# Altium PCB TPS54331 MOUDLE.PcbDoc
Units mm, origin at the board's own origin, x right, y up, seen from the top; angles counter-clockwise.
Board outline 33.75 x 33.7 mm, 2 copper layers (Top Layer, Bottom Layer); 27 components, 12 nets, 89 pads, 43 vias.
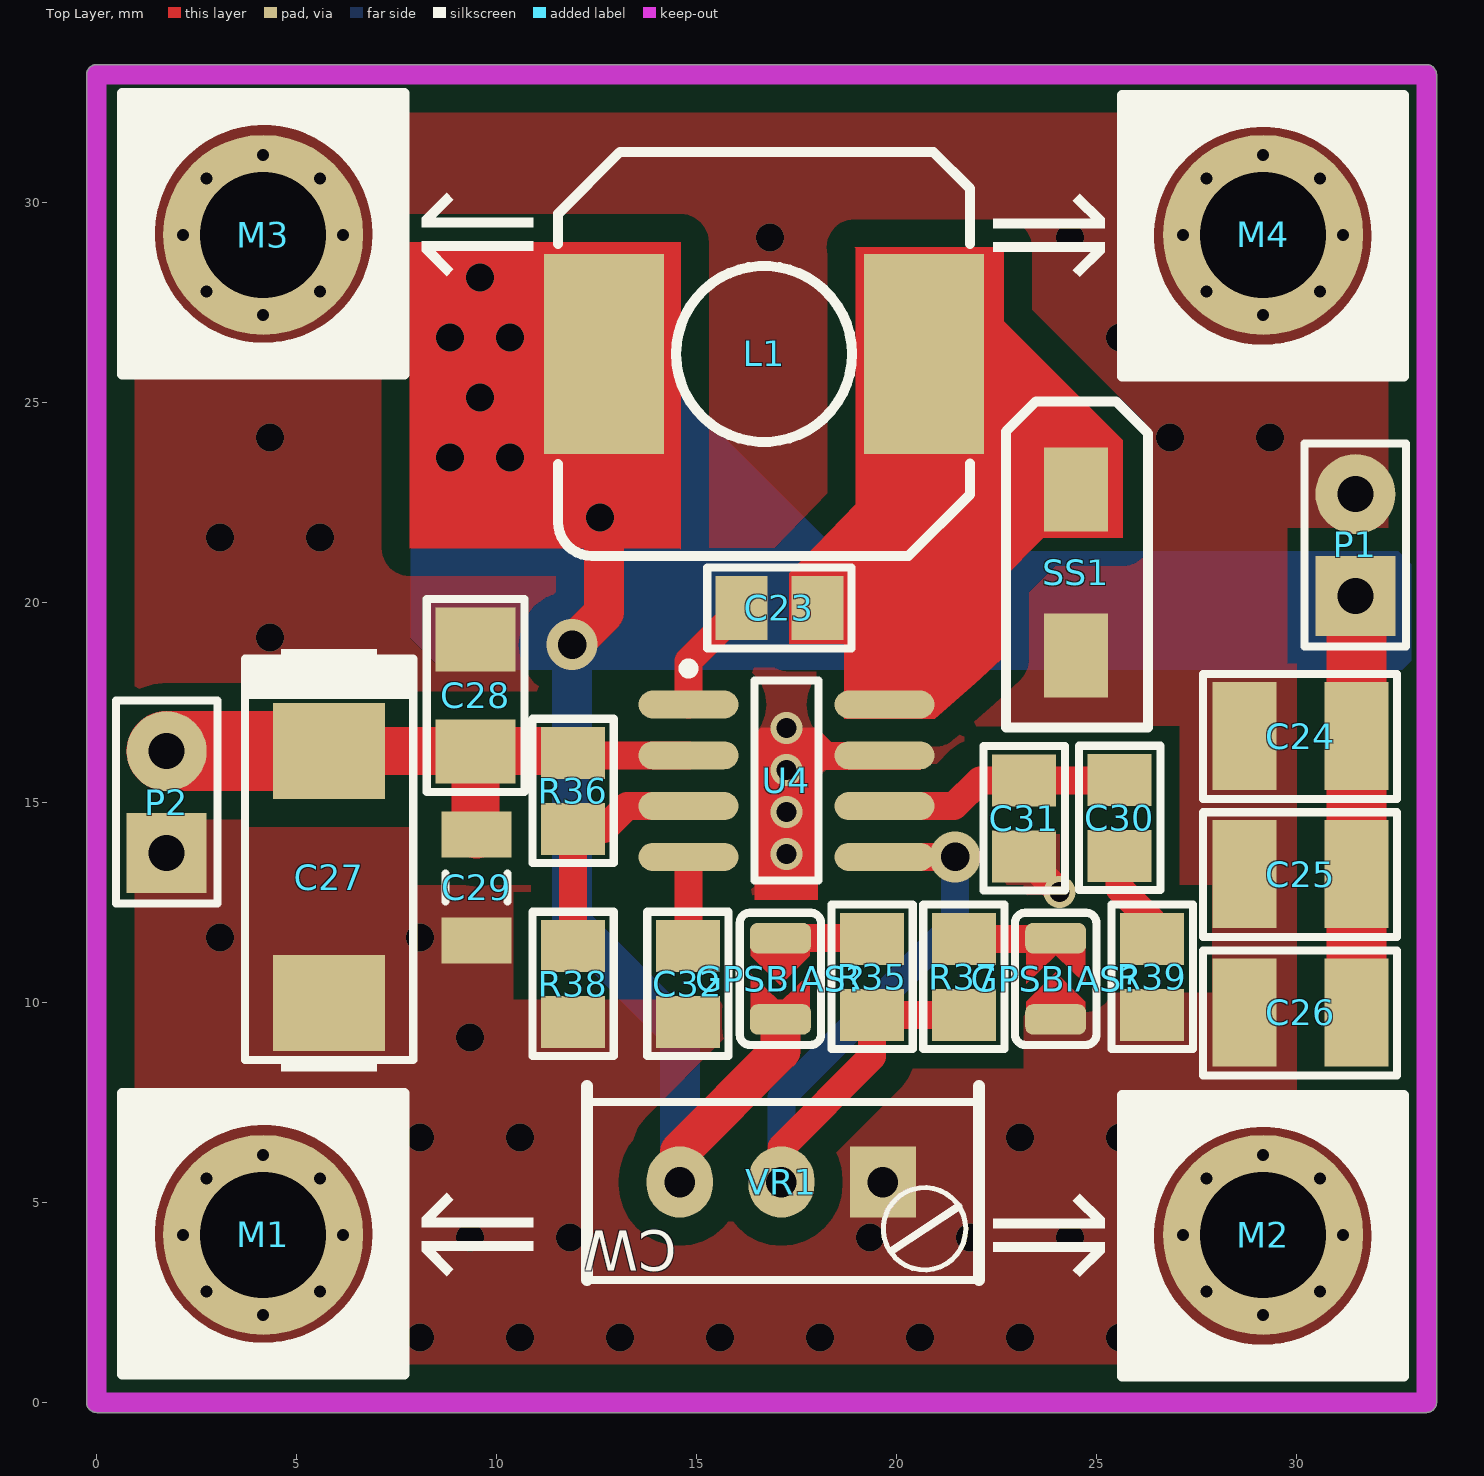
[diagram p0: Top Layer view]
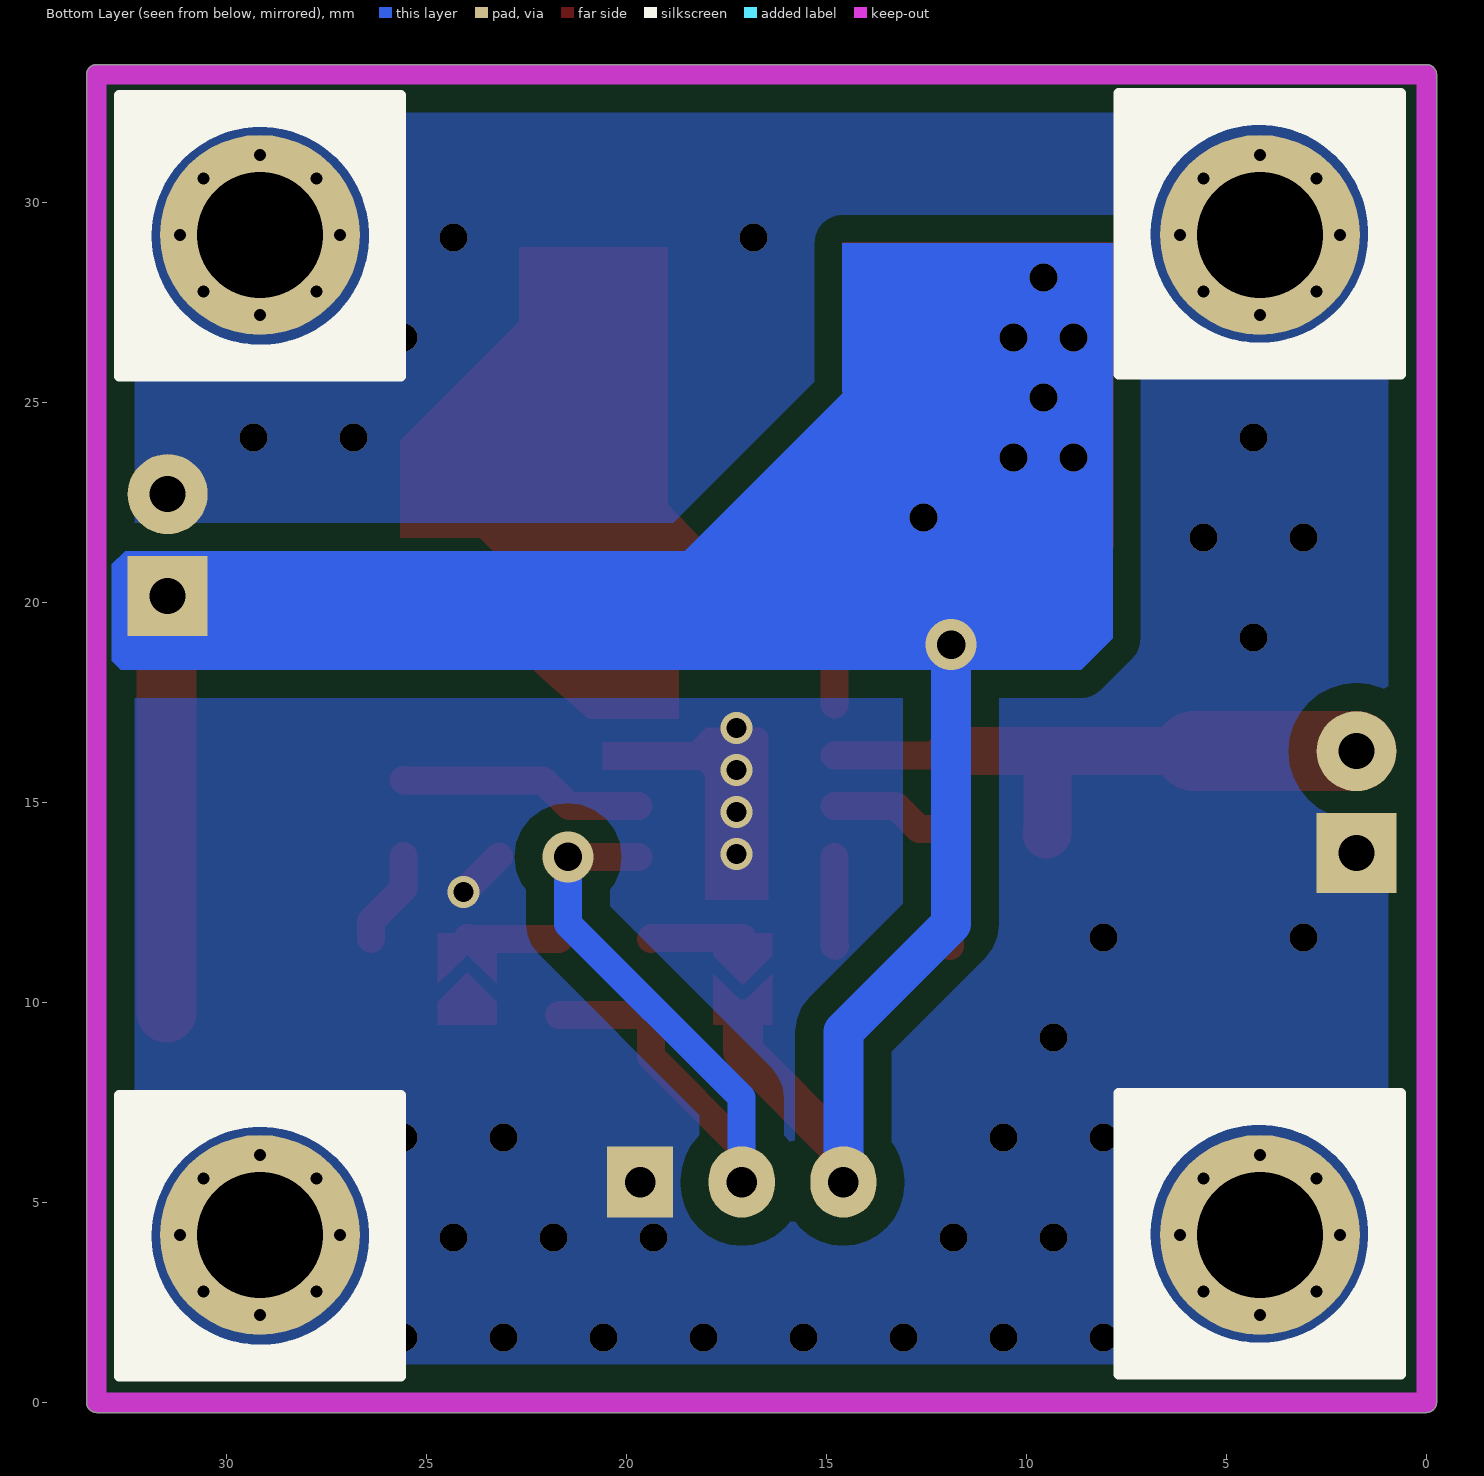
[diagram p1: Bottom Layer view, seen from below]
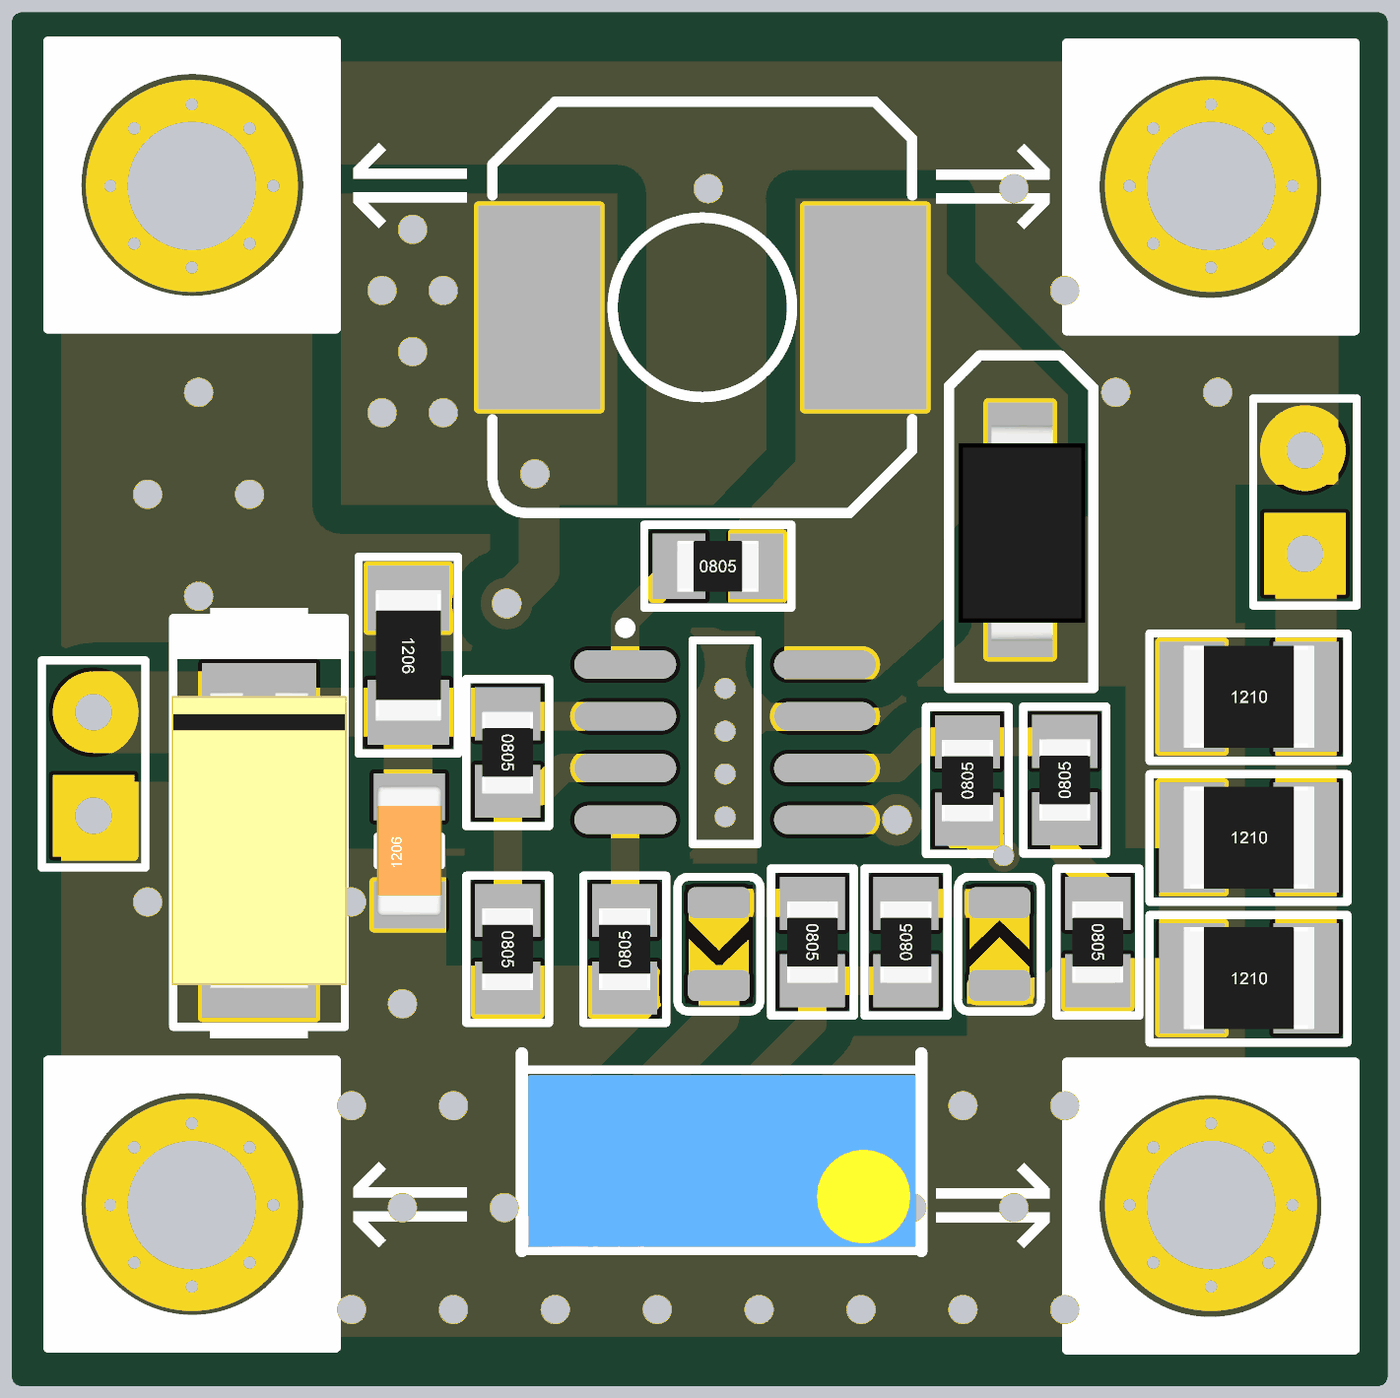
[diagram p2: 3D render of the assembled board from above, using the file's embedded part models]

## Layer stack, top to bottom
Top Solder: solder mask 0.0102, Solder Resist, Dk 3.5
Top Layer: signal copper 0.0356
Dielectric 1: dielectric 0.32, FR-4, Dk 4.8
Bottom Layer: signal copper 0.0356
Bottom Solder: solder mask 0.0102, Solder Resist, Dk 3.5

## Board outline
-0.25,0 ccw(c0,0) 0,-0.25 33.249,-0.25 ccw(c33.249,0) 33.499,0 33.499,33.198 ccw(c33.249,33.198) 33.249,33.448 0,33.448 ccw(c0,33.198) -0.25,33.198

## Design rules (kind name [scope] priority, off if disabled: settings)
Clearance Clearance_7 [InNamedPolygon('GND_L01_P002')] p1: gap=0.254 ignorepadtopadclearanceinfootprint=FALSE except(0: Arc-Hole Track-Hole SMDPad-Hole THPad-Hole Via-Hole Fill-Hole Poly-Hole Region-Hole Text-Hole; 0.7: Arc-Poly Track-Poly SMDPad-Poly THPad-Poly Via-Poly Fill-Poly Poly-Poly Poly-Region)
Clearance Clearance_6 [InNamedPolygon('GND_L01_P002')] p2: gap=0.254 ignorepadtopadclearanceinfootprint=FALSE except(0: Arc-Hole Track-Hole SMDPad-Hole THPad-Hole Via-Hole Fill-Hole Poly-Hole Region-Hole Text-Hole; 0.7: Arc-Poly Track-Poly SMDPad-Poly THPad-Poly Via-Poly Fill-Poly Poly-Poly)
Clearance Clearance_5 [InNamedPolygon('GND_L01_P002')] p3: gap=0.254 ignorepadtopadclearanceinfootprint=FALSE except(0: Arc-Hole Track-Hole SMDPad-Hole THPad-Hole Via-Hole Fill-Hole Poly-Hole Region-Hole Text-Hole; 0.7: Arc-Poly Track-Poly SMDPad-Poly THPad-Poly Via-Poly Fill-Poly Poly-Poly)
Clearance Clearance_4 [InNamedPolygon('GND_L01_P002')] p4: gap=0.254 ignorepadtopadclearanceinfootprint=FALSE except(0: Arc-Hole Track-Hole SMDPad-Hole THPad-Hole Via-Hole Fill-Hole Poly-Hole Region-Hole Text-Hole; 0.7: Arc-Poly)
Clearance Clearance_3 [InNamedPolygon('GND_L02_P001')] p5: gap=0.254 ignorepadtopadclearanceinfootprint=FALSE except(0: Arc-Hole Track-Hole SMDPad-Hole THPad-Hole Via-Hole Fill-Hole Poly-Hole Region-Hole Text-Hole; 0.7: Arc-Poly Track-Poly SMDPad-Poly THPad-Poly Via-Poly Fill-Poly Poly-Poly Poly-Region)
Clearance Clearance_2 [InNamedPolygon('GND_L02_P001')] p6: gap=0.254 ignorepadtopadclearanceinfootprint=FALSE except(0: Arc-Hole Track-Hole SMDPad-Hole THPad-Hole Via-Hole Fill-Hole Poly-Hole Region-Hole Text-Hole; 0.7: Arc-Poly Track-Poly SMDPad-Poly THPad-Poly Via-Poly Fill-Poly Poly-Poly)
Clearance Clearance_1 [InNamedPolygon('GND_L02_P001')] p7: gap=0.254 ignorepadtopadclearanceinfootprint=FALSE except(0: Arc-Hole Track-Hole SMDPad-Hole THPad-Hole Via-Hole Fill-Hole Poly-Hole Region-Hole Text-Hole; 0.7: Arc-Poly Track-Poly SMDPad-Poly THPad-Poly Via-Poly Fill-Poly Poly-Poly)
Clearance [All] p8: gap=0.254 ignorepadtopadclearanceinfootprint=FALSE except(0: Arc-Hole Track-Hole SMDPad-Hole THPad-Hole Via-Hole Fill-Hole Poly-Hole Region-Hole Text-Hole)
PolygonConnect PolygonConnect_6 [All vs IsNamedPolygon('GND_L01_P002')] p1: connectstyle=Direct reliefconductorwidth=0.254 reliefentries=4 polygonreliefangle="90 Angle" airgapwidth=0.254
PolygonConnect PolygonConnect_5 [All vs IsNamedPolygon('GND_L01_P002')] p2: connectstyle=Direct reliefconductorwidth=0.254 reliefentries=4 polygonreliefangle="90 Angle" airgapwidth=0.254
PolygonConnect PolygonConnect_4 [All vs IsNamedPolygon('GND_L01_P002')] p3: connectstyle=Direct reliefconductorwidth=0.254 reliefentries=4 polygonreliefangle="90 Angle" airgapwidth=0.254
PolygonConnect PolygonConnect_3 [All vs IsNamedPolygon('GND_L02_P001')] p4: connectstyle=Direct reliefconductorwidth=0.254 reliefentries=4 polygonreliefangle="90 Angle" airgapwidth=0.254
PolygonConnect PolygonConnect_2 [All vs IsNamedPolygon('GND_L02_P001')] p5: connectstyle=Direct reliefconductorwidth=0.254 reliefentries=4 polygonreliefangle="90 Angle" airgapwidth=0.254
PolygonConnect PolygonConnect_1 [All vs IsNamedPolygon('GND_L02_P001')] p6: connectstyle=Direct reliefconductorwidth=0.254 reliefentries=4 polygonreliefangle="90 Angle" airgapwidth=0.254
PolygonConnect [All] p7: connectstyle=Relief reliefconductorwidth=0.254 reliefentries=4 polygonreliefangle="90 Angle" airgapwidth=0.254
RoutingVias [All] p1: holewidth=0.711 width=1.27 viastyle="Through Hole" minholewidth=0.711 minwidth=1.27 maxholewidth=0.711 maxwidth=1.27
SolderMaskExpansion [All] p1: expansion=0.102 istentingtop=FALSE
Width [All] p1: maxlimit=2 minlimit=0.254 preferedwidth=0.254
30 further rules are at their usual default settings.

## Components (designator, comment, footprint, x,y, rotation, side; value= is the part's Value field where it differs from the comment)
C23 "100nF" MY_0805 17.069,19.863 r0 top
C24 "C3216X5R1C476M160AB" MY_1210 30.099,16.662 r0 top
C25 "47uF" MY_1210 30.099,13.208 r0 top
C26 "47uF" MY_1210 30.099,9.754 r0 top
C27 "10u" MY_SMC_D 5.817,13.132 r270 top
C28 "10uF" MY_1206 9.5,17.704 r270 top
C29 "10nF" "CAP 1206 (3216X15L)" 9.5,12.878 r90 top
C30 "1nF" MY_0805 25.578,14.615 r90 top
C31 "47pF" MY_0805 23.19,14.605 r90 top
C32 "10nF" MY_0805 14.783,10.465 r90 top
GPSBIAS? "SOLDERJUMPER" SOLDERJUMPER_ARROW_NOPASTE 17.094,10.592 r270 top
GPSBIAS? "SOLDERJUMPER" SOLDERJUMPER_ARROW_NOPASTE 23.978,10.592 r90 top
L1 "NR10050T100M" MY_DR1030 16.688,26.213 r90 top
M1 "Screw" "Board Screw" 4.166,4.191 r90 top
M2 "Screw" "Board Screw" 29.166,4.191 r270 top
M3 "Screw" "Board Screw" 4.166,29.191 r90 top
M4 "Screw" "Board Screw" 29.166,29.191 r270 top
P1 "Header 2" HDR1X2 31.471,20.168 r90 top
P2 "Header 2" HDR1X2 1.753,13.741 r90 top
R35 "10.2K" MY_0805 19.389,10.643 r270 top
R36 "332K" MY_0805 11.913,15.291 r270 top
R37 "3.24K" MY_0805 21.683,10.643 r90 top
R38 "68.1k" MY_0805 11.913,10.465 r270 top
R39 "29.4K" MY_0805 26.391,10.643 r270 top
SS1 "shot key" "Diode smd" 24.486,20.879 r90 top
U4 "TPS54331" SOIC8_M 17.247,15.545 r0 top
VR1 "1K" "Multi Turn 02" 19.66,5.512 r270 top

## Footprints (in the part's own frame and the unit in brackets; to place one, negate y for a bottom-side part, rotate by r counter-clockwise, add the part's x,y. Pads: shape width x height; smd on the part's side, far side on the other; paste and mask are expansions set on the pad)
"Board Screw" [mm]
  round 0.6 hole 0.3: S(-2,0) S(-1.414,-1.414) S(-1.414,1.414) S(0,2) S(0,-2) S(1.414,-1.414) S(1.414,1.414) S(2,0)
  round 5 hole 3.15 mask+0.1: S(0,0)
  silkscreen extent -3.49,-6.75 3.56,3.52
"CAP 1206 (3216X15L)" [mm] "Chip Capacitor, 2-Leads, Body 3.2x1.6mm, IPC High Density"
  rect 1.15x1.75 smd: 1(-1.325,0) 2(1.325,0)
  silkscreen extent -0.35,-0.77 0.35,0.77, body extent -1.6,-0.8 1.6,0.8, height 1
"Diode smd" [mm]
  rect 2.1x1.6 smd: 0(-2.2,0) 1(1.95,0)
  silkscreen extent -4,-1.8 4.15,1.75, body extent -2.85,-1.6 2.45,1.51, height 2.4
HDR1X2 [mm] "Connector; Header; 2 Position"
  rect 2x2 hole 0.9: 1(0,0)
  round 2 hole 0.9: 2(2.54,0)
  silkscreen extent -1.27,-1.27 3.81,1.27
"Multi Turn 02" [mil]
  rect 70x65 hole 30: 1(0,0)
  oval 70x65 hole 30: 2(0,-200) 3(0,-100)
  silkscreen extent -94,-291 96,94, body extent -73,-285 93,89, height 452
MY_0805 [mm]
  rect 1.3x1.6 smd: 1(-0.95,0) 2(0.95,0)
  silkscreen extent -1.8,-1.02 1.8,1.02, body extent -1,-0.62 1,0.63, height 0.59
MY_1206 [mm]
  rect 1.6x2 smd: 1(-1.375,-0.025) 2(1.425,-0.025)
  silkscreen extent -2.39,-1.24 2.44,1.19, body extent -1.57,-0.83 1.63,0.77, height 0.59
MY_1210 [mm]
  rect 1.6x2.7 smd: 1(-1.4,0) 2(1.4,0)
  silkscreen extent -2.44,-1.57 2.41,1.55, body extent -1.6,-1.25 1.6,1.25, height 0.59
MY_DR1030 [mm]
  rect 5x3 smd: 1(0,-4) 2(0,4)
  silkscreen extent -5.05,-5.15 5.05,5.15
MY_SMC_D [mm]
  rect 2.4x2.8 smd: +(-3.15,0) -(3.15,0)
  silkscreen extent -5.71,-2.11 4.85,2.1, body extent -3.65,-2.15 3.65,2.15, height 2.83
SOIC8_M [mm] "SOIC, 8-Leads, Body 4.9x3.9mm, Pitch 1.27mm, IPC Low Density"
  oval 2.5x0.7 smd: 1(-2.45,1.905) 2(-2.45,0.635) 3(-2.45,-0.635) 4(-2.45,-1.905) 5(2.45,-1.905) 6(2.45,-0.635) 7(2.45,0.635) 8(2.45,1.905)
  silkscreen extent -2.57,-2.5 0.8,2.93, body extent -2,-2.5 2,2.5, height 1.75
SOLDERJUMPER_ARROW_NOPASTE [mil]
  rrect50% 30x60 smd: 1(-40,0) 2(40,0)
  Top Layer region: -45,29 -22.5,29 6.5,0 -22.5,-29 -45,-29
  Top Layer region: -5,29 23,0 -5,-29 45,-29 45,29
  silkscreen extent -65,-40 65,40

## Part data
C23 C24 C25 C26 C28 C29 C30 C31 C32: library part "Cap ceramic", "None polar capacitor"
C27: library part "Cap Pol", "Polar capacitor"
GPSBIAS? GPSBIAS?: "SMD Solder JUMPER   Solder the two pads together to create a connection, or remove the solder to break it.REFLOW - Use this footprint for solder paste and reflow ovens. WAVE - Use this footprint for hand-soldering (larger pads).    CLOSED - Has a trace between the two pads to ensure it is closed by default.  The trace needs to be cut to disable the jumper, and can be closed again by creating a solder bridge between the two pads."
L1: library part Inductor, "Inductor"
M1 M2 M3 M4: library part "Board Screw", "Board Screw With Spacer"
P1 P2: "Header, 2-Pin"
R35 R36 R37 R38 R39: library part Res, "Standard resistor"
SS1: library part "Diode smd"
U4: "3A, 28V INPUT, STEP DOWN SWIFT™ DC/DC CONVERTER WITH ECO-MODE"
VR1: library part "Resistor Variable", "Variable Resistor"

## Via types
v1: diameter 0.7, hole 0.7, Top Layer to Bottom Layer, tented both sides, 36 vias
v2: diameter 0.8, hole 0.5, Top Layer to Bottom Layer, tented both sides, 5 vias
v3: diameter 1.27, hole 0.711, Top Layer to Bottom Layer, tented both sides, 2 vias

## Nets (pads, with @x,y where several pads share a name; then routed paths per layer and width w, separated by ;. In a path a pad name is that pad's centre, name@x,y a point inside that pad or via, vN(x,y) a via of type N, cw(c..) or ccw(c..) an arc to the next point about the centre after c; other vN are vias at no path point)
+3.3: C24.2 C25.2 C26.2 GPSBIAS?.2@17.094,9.576 L1.2 P1.1 VR1.2 | length 37.7
  Top Layer w1: v3(11.887,18.948) 12.688,19.749 L1.2 ; VR1.2 14.58,6.274 17.094,8.788 GPSBIAS?.2@17.094,9.576
  Top Layer w1.5: P1.1 31.499,20.139 C25.2 C26.2
  Bottom Layer w1: v3(11.887,18.948) 11.887,11.963 14.58,9.271 VR1.2
  other v1: 12.581,22.127 8.831,23.627 10.331,23.627 9.581,25.127 8.831,26.627 10.331,26.627 9.581,28.127
+12: C27.+ C28.2 C29.2 P2.2 R36.1 U4.2 | length 15.2
  Top Layer w0.7: R36.1 11.974,16.18 U4.2
  Top Layer w1.2: C27.+ 11.872,16.282 R36.1 ; C28.2 9.474,14.228 C29.2
  Top Layer w2: P2.2 C27.+
GND: C24.1 C25.1 C26.1 C27.- C28.1 C29.1 C31.1 C32.1 GPSBIAS?.1@23.978,9.576 M1.S M2.S M3.S M4.S P1.2 P2.1 R38.2 R39.2 SS1.0 U4.7 VR1.1 | length 1.3
  Top Layer w0.7: C31.1 23.19,13.651 v2(24.078,12.763)
  other v1: 8.081,1.627 10.581,1.627 13.081,1.627 15.581,1.627 18.081,1.627 20.581,1.627 23.081,1.627 25.581,1.627 9.331,4.127 11.831,4.127 19.331,4.127 21.831,4.127 24.331,4.127 8.081,6.627 10.581,6.627 23.081,6.627 25.581,6.627 9.331,9.127 3.081,11.627 8.081,11.627 4.331,19.127 3.081,21.627 5.581,21.627 4.331,24.127 26.831,24.127 29.331,24.127 25.581,26.627 16.831,29.127 24.331,29.127
  other v2: 17.247,13.716 17.247,14.766 17.247,15.816 17.247,16.866
NetC23_1: C23.1 U4.1 | length 3
  Top Layer w0.7: U4.1 14.797,18.541 C23.1
NetC23_2: C23.2 L1.1 SS1.1 U4.8
NetC30_1: C30.1 R39.1 | length 2.4
  Top Layer w0.7: C30.1 25.578,12.852 26.391,12.04 R39.1
NetC30_2: C30.2 C31.2 U4.6 | length 6.2
  Top Layer w0.7: U4.6 21.438,14.91 22.083,15.555 C31.2 25.568,15.555 C30.2
NetC32_2: C32.2 U4.4 | length 2.2
  Top Layer w0.7: C32.2 14.797,11.429 U4.4
NetGPSBIAS?_1: GPSBIAS?.1@17.094,11.608 R35.1 | length 2.3
  Top Layer w0.7: GPSBIAS?.1@17.094,11.608 19.373,11.608 R35.1
NetGPSBIAS?_2: GPSBIAS?.2@23.978,11.608 R37.2 | length 2.3
  Top Layer w0.7: R37.2 23.962,11.593 GPSBIAS?.2@23.978,11.608
NetR35_2: R35.2 R37.1 U4.5 VR1.3 | length 19.1
  Top Layer w0.7: VR1.3 17.12,6.375 19.389,8.644 R35.2 R37.1 ; U4.5 v3(21.463,13.64)
  Bottom Layer w0.7: VR1.3 17.12,7.62 21.463,11.963 v3(21.463,13.64)
NetR36_2: R36.2 R38.1 U4.3 | length 6
  Top Layer w0.7: R38.1 R36.2 12.69,14.341 13.259,14.91 U4.3

## Polygon pours and split planes (outlines as drawn)
GND on Bottom Layer "GND_L02_P001" (solid, pour order 1): -0.25,0 ccw(c0,0) 0,-0.25 33.249,-0.25 ccw(c33.249,0) 33.499,0 33.499,33.198 ccw(c33.249,33.198) 33.249,33.448 0,33.448 ccw(c0,33.198) -0.25,33.198
GND on Top Layer "GND_L01_P002" (solid, remove dead copper, pour order 2): -0.25,0 ccw(c0,0) 0,-0.25 33.249,-0.25 ccw(c33.249,0) 33.499,0 33.499,33.198 ccw(c33.249,33.198) 33.249,33.448 0,33.448 ccw(c0,33.198) -0.25,33.198

## Keep-outs
Keep-Out Layer:
  lines w0.5: 0,0 33.249,0 33.249,33.198 0,33.198 0,16.053 0,0

## Other copper
Top Layer:
  region net +3.3: 14.605,29.007 7.823,29.007 7.823,21.361 14.58,21.361 14.605,21.336
  region net GND: 20.599,16.51 18.364,16.51 18.009,16.866 16.612,16.866 16.459,16.713 16.459,12.573 16.485,12.573 18.034,12.573 18.034,15.672 18.186,15.824 20.599,15.824
  region net NetC23_2: 17.323,20.726 17.323,18.974 18.694,18.974 18.694,17.094 20.955,17.094 21.971,17.983 22.606,18.567 22.606,20.549 23.673,21.615 25.654,21.615 25.654,24.054 22.682,27.026 22.682,28.88 18.948,28.88 18.974,28.854 18.974,22.454
Bottom Layer:
  region net +3.3: 7.849,28.981 14.605,28.981 14.605,25.273 14.58,25.248 18.542,21.285 32.537,21.285 32.868,20.955 32.868,18.542 32.639,18.313 8.636,18.313 7.849,19.101

## Text inside footprints (layer, text, board x,y; h text height)
VR1: Top Overlay "CW" at 14.503,4.293 h1 r180